# EAGLE board _plant monitoring and watering system (sanjana taware) (EAGLE 9.7.0)

Size 158.63 x 92.08 mm. Coordinates in mm from the lower left corner, seen from the top.
Outline: 0,0 158.63,0 158.63,92.08 0,92.08 0,0
Copper layers (1*16): Top 0.035mm / dielectric 1.5mm / Bottom 0.035mm
Design rules "default": minimum track width 6mil, minimum drill 0.35mm, track to track 6mil, track to pad 6mil, pad to pad 6mil, via to via 6mil, smd to smd 6mil, copper to edge 40mil, drill to drill 6mil, minimum pad ring 10mil, minimum via ring 8mil, stop-mask expansion 4mil, vias tented up to drill 0mil, thermal gap 10mil

## Footprints (pad centres in the part's own frame; a part is rotated, then mirrored left to right if it is on the bottom)
DIODE-AXIAL = drill 1: 1 -5.08,0; 2 5.08,0
LED-RGB-5MM = drill 0.9: B 0.635,0.635; C -0.635,-0.635; G 1.905,-0.635; R -1.905,0.635
MOTOR = drill 1.118 pad 3.15 octagon: + 2.54,0; - -2.54,0
TO220V = drill 1.016 long: 1 -2.54,-2.54; 2 0,-2.54; 3 2.54,-2.54
RESAD1016W63L850D250B = drill 0.83 pad 1.43: 1 -5.08,0; 2 5.08,0
SEN-13322 = drill 1.016 long: 1 -2.54,0; 2 0,0; 3 2.54,0
ARDUINO-UNO-R3-SHIELD = drill 1.016 pad 1.88: 3.3V 24.13,-2.54; 5V 24.13,0; A0 24.13,12.7; A1 24.13,15.24; A2 24.13,17.78; A3 24.13,20.32; A4 24.13,22.86; A5 24.13,25.4; AREF -24.13,-13.97; D2 -24.13,20.32; D3 -24.13,17.78; D4 -24.13,15.24; D5 -24.13,12.7; D6 -24.13,10.16; D7 -24.13,7.62; D8 -24.13,3.81; D9 -24.13,1.27; D10 -24.13,-1.27; D11 -24.13,-3.81; D12 -24.13,-6.35; D13 -24.13,-8.89; GND@0 24.13,2.54; GND@1 24.13,5.08; GND@2 -24.13,-11.43; IOREF 24.13,-7.62; NC 24.13,-10.16; RES 24.13,-5.08; RX -24.13,25.4; SCL -24.13,-19.05; SDA -24.13,-16.51; TX -24.13,22.86; VIN 24.13,7.62

## Placement (x,y rotation side)
DDIODE  DIODEDIODE-AXIAL  [DIODE-AXIAL]  118.66,79.13 180 top
DLED  LED-RGBRCBG-PTH  [LED-RGB-5MM]  104.8,24.18 270 top
MDC_MOTOR  MOTOR_HDR  [MOTOR]  106.18,83.82 0 top
QTRANSISTOR  TIP120_TO220-V  [TO220V]  70.94,75.62 0 top
RRESISTOR_2  200  [RESAD1016W63L850D250B]  99.72,33.07 90 top
RRESISTOR_3  200  [RESAD1016W63L850D250B]  102.26,15.29 90 top
SENSOIL_MOISTURE_SENSOR  SEN-13322  [SEN-13322]  151.64,50.85 0 top
U_ARDUINO_UNO  ARDUINO-UNO-R3-SHIELD  [ARDUINO-UNO-R3-SHIELD]  47.88,29.84 270 top

## Library data of the parts
DDIODE DLED MDC_MOTOR QTRANSISTOR RRESISTOR_2 RRESISTOR_3 SENSOIL_MOISTURE_SENSOR U_ARDUINO_UNO = Tinkercad

## Nets
DLED_G: DLED.G RRESISTOR_3.2
DLED_R: DLED.R RRESISTOR_2.1
MDC_MOTOR_-: DDIODE.2 MDC_MOTOR.- QTRANSISTOR.2
U_ARDUINO_UNO_5V: DDIODE.1 MDC_MOTOR.+ SENSOIL_MOISTURE_SENSOR.1 U_ARDUINO_UNO.5V
U_ARDUINO_UNO_A0: SENSOIL_MOISTURE_SENSOR.3 U_ARDUINO_UNO.A0
U_ARDUINO_UNO_D2: QTRANSISTOR.1 U_ARDUINO_UNO.D2
U_ARDUINO_UNO_D3: RRESISTOR_2.2 U_ARDUINO_UNO.D3
U_ARDUINO_UNO_D4: RRESISTOR_3.1 U_ARDUINO_UNO.D4
U_ARDUINO_UNO_GND: DLED.C QTRANSISTOR.3 SENSOIL_MOISTURE_SENSOR.2 U_ARDUINO_UNO.GND@0 U_ARDUINO_UNO.GND@1 U_ARDUINO_UNO.GND@2

## Tracks (layer width: path | path; a pad name or v marks a point on that pad's centre or on a via)
DLED_G  (1 unrouted)
DLED_R  (1 unrouted)
MDC_MOTOR_-  (2 unrouted)
U_ARDUINO_UNO_5V  (3 unrouted)
U_ARDUINO_UNO_A0  (1 unrouted)
U_ARDUINO_UNO_D2  (1 unrouted)
U_ARDUINO_UNO_D3  (1 unrouted)
U_ARDUINO_UNO_D4  (1 unrouted)
U_ARDUINO_UNO_GND  (5 unrouted)